# Altium PCB PCB.PcbDoc
Units mm, origin at the board's own origin, x right, y up, seen from the top; angles counter-clockwise.
Board outline 45 x 65 mm, 2 copper layers (Top Layer, Bottom Layer); 56 components, 54 nets, 217 pads, 482 vias.
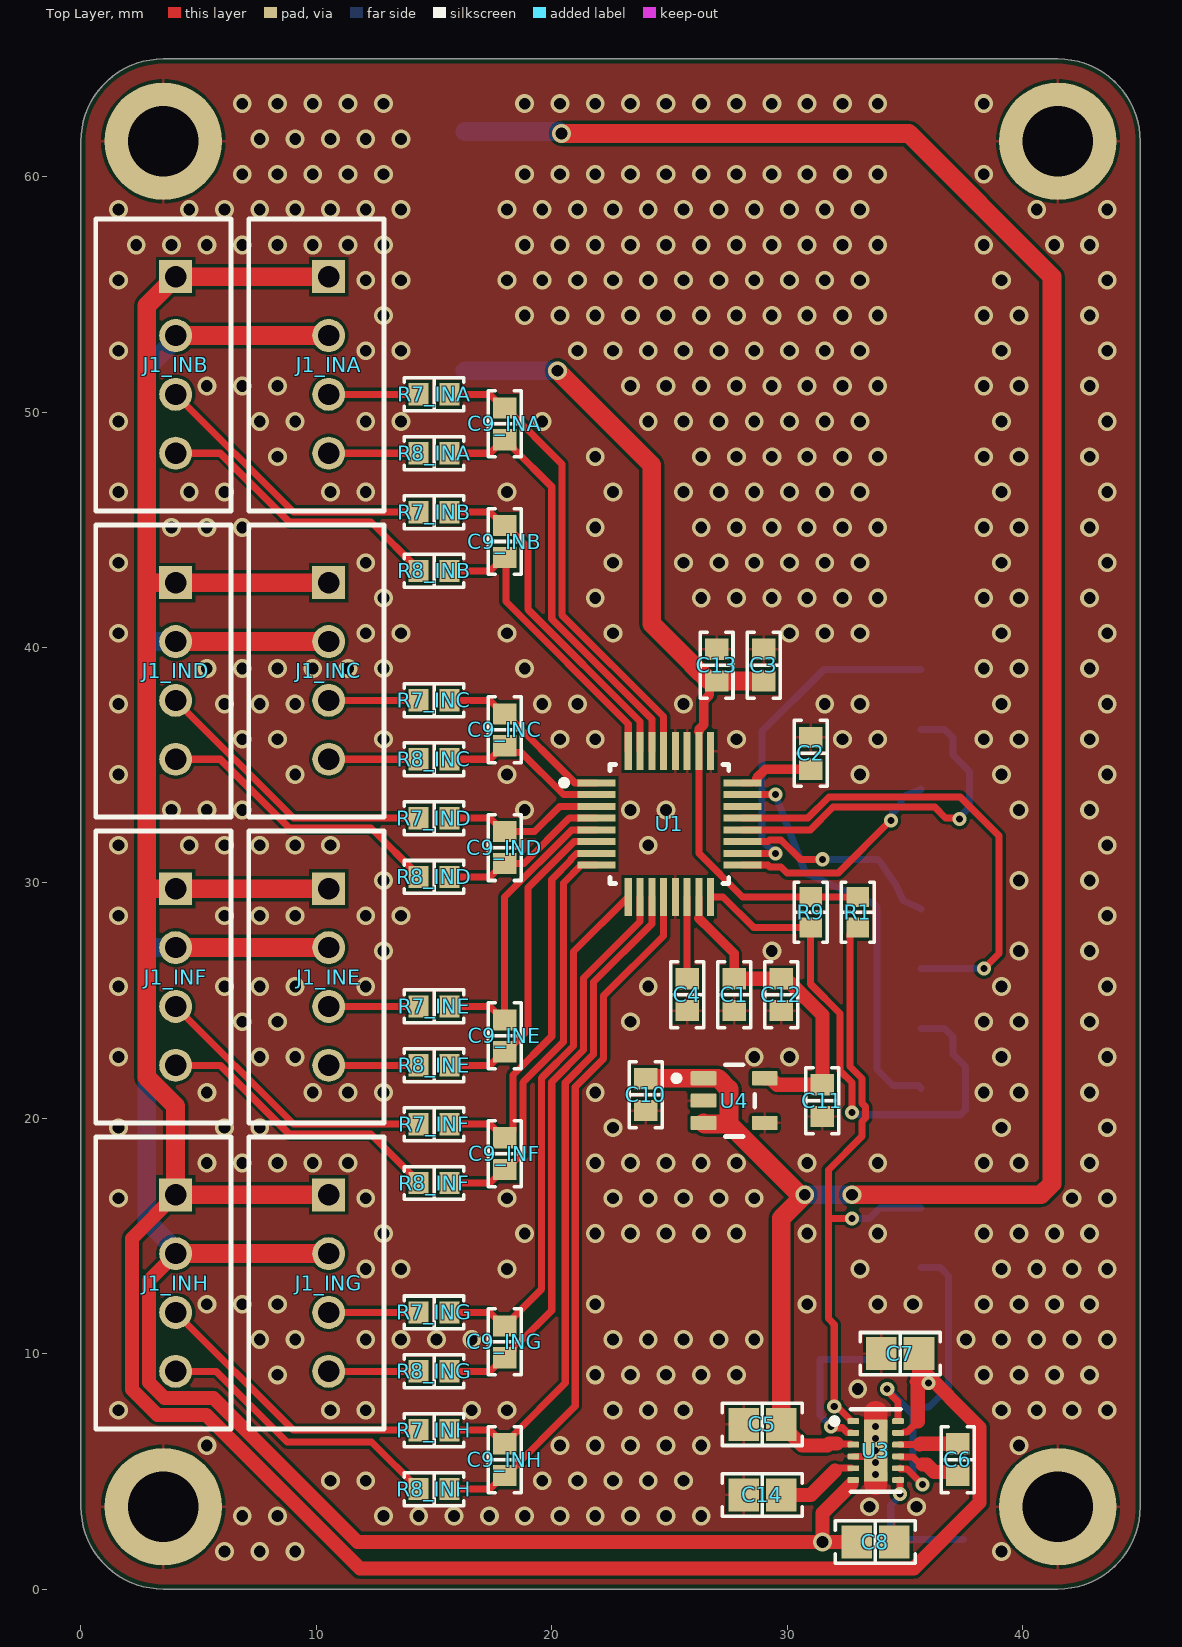
[diagram p0: Top Layer view]
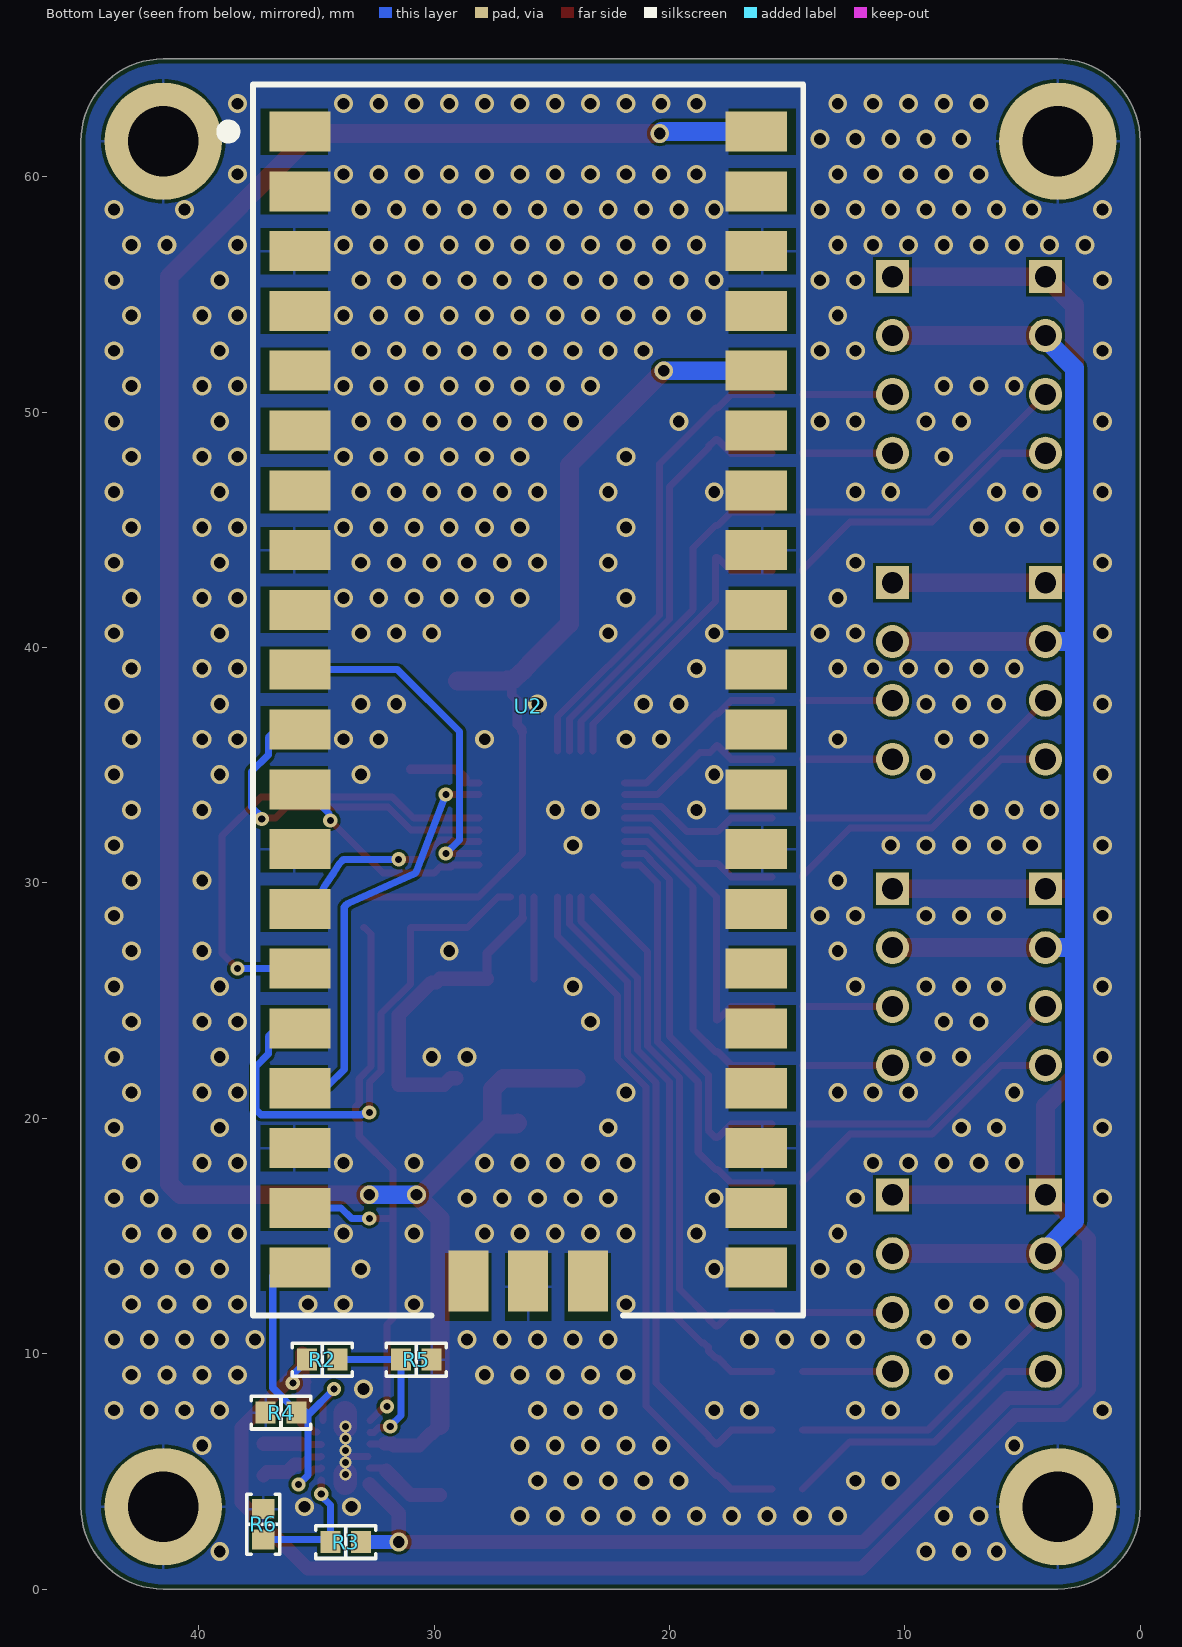
[diagram p1: Bottom Layer view, seen from below]
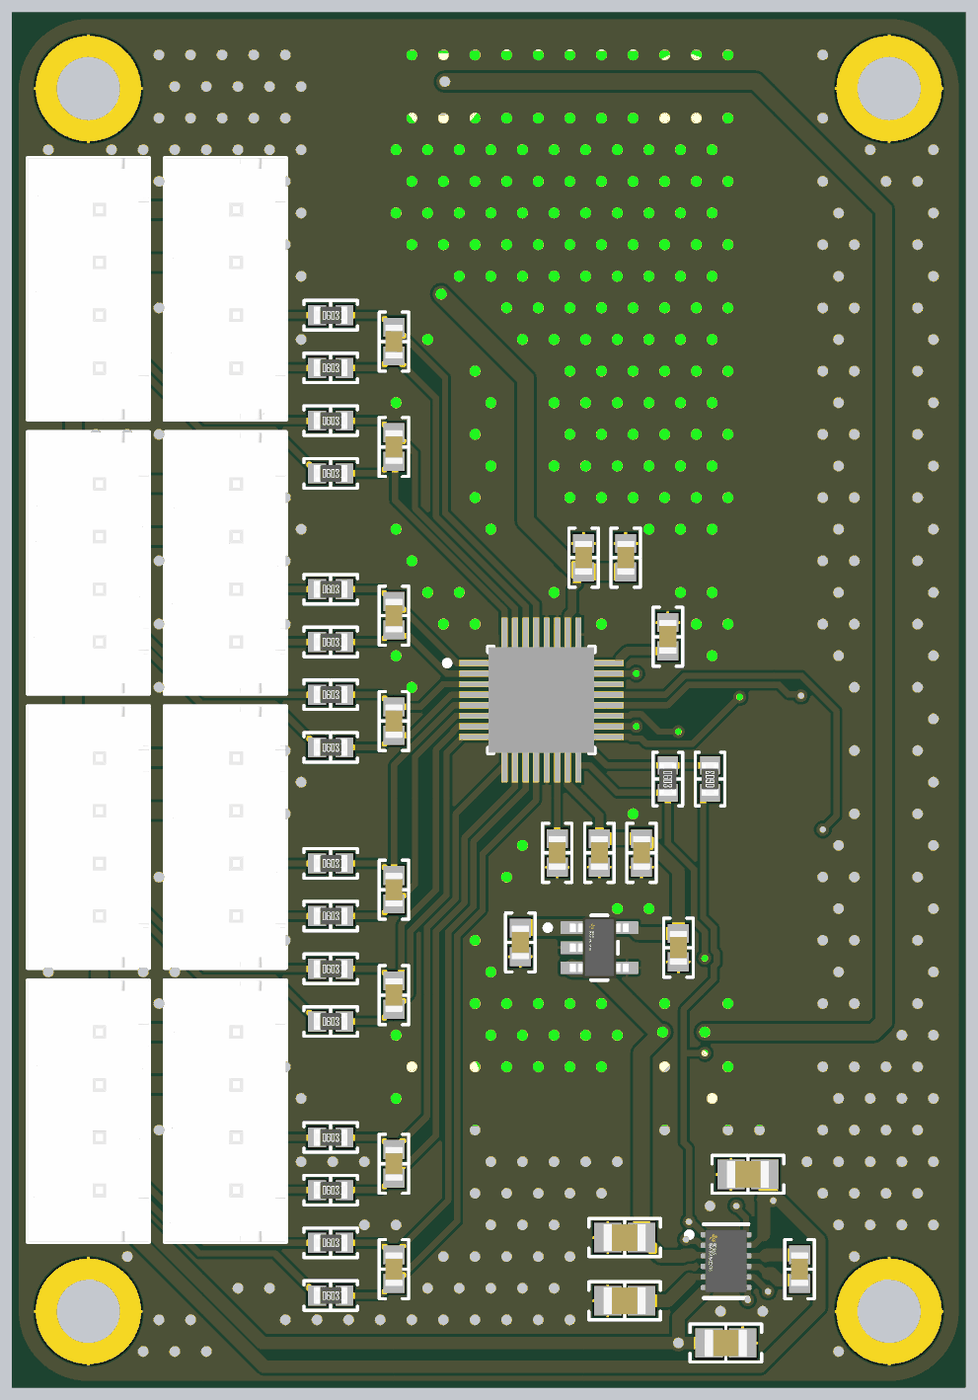
[diagram p2: 3D render of the assembled board from above, using the file's embedded part models]
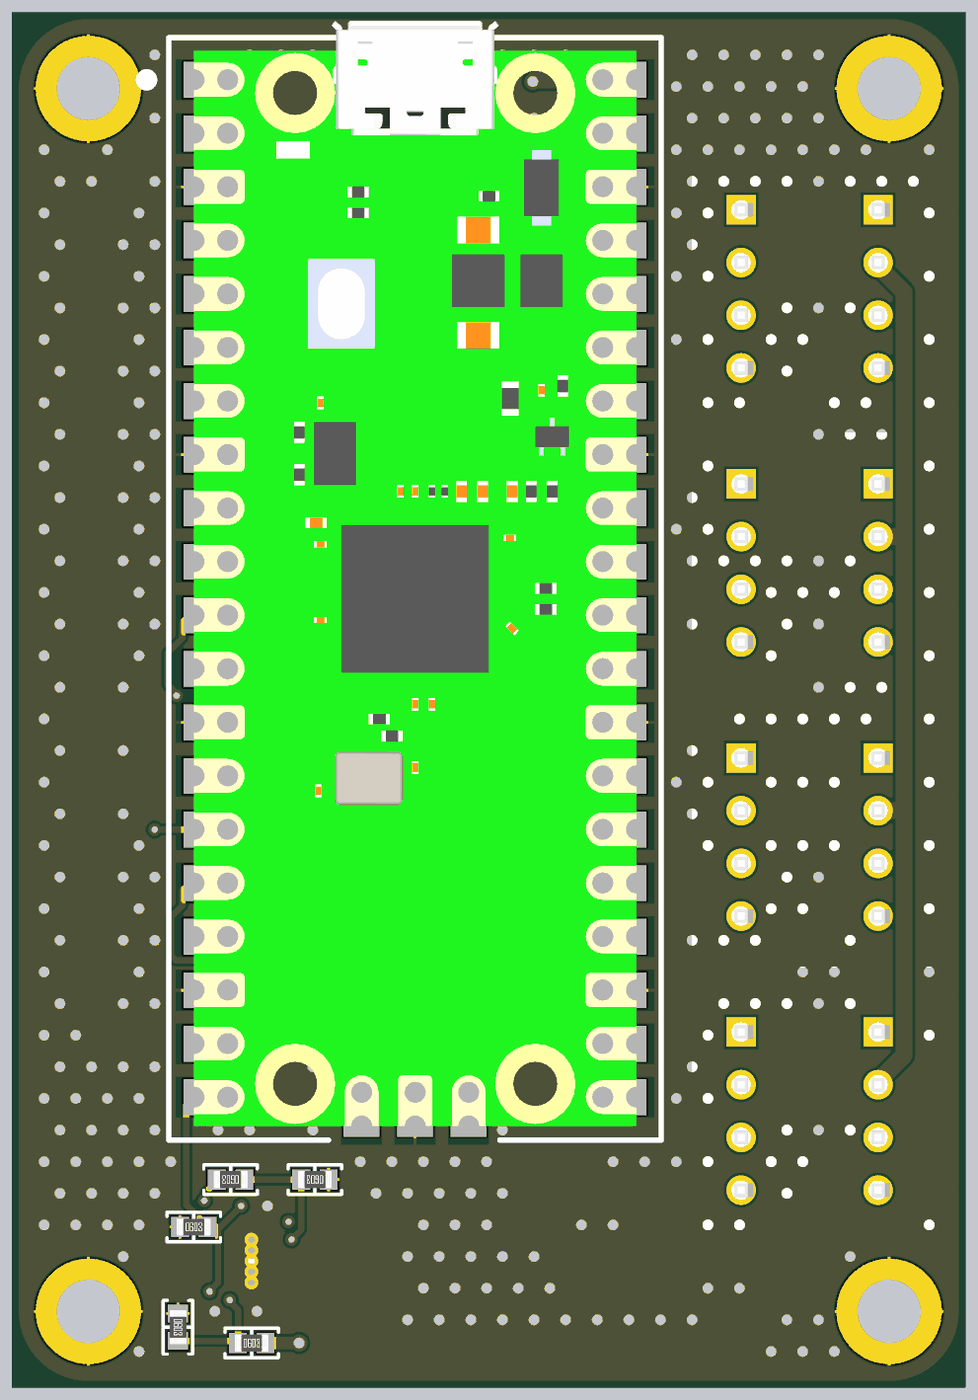
[diagram p3: 3D render of the assembled board from below, using the file's embedded part models]

## Layer stack, top to bottom
Top Solder: solder mask 0.0102, Solder Resist, Dk 3.5
Top Layer: signal copper 0.0356
Dielectric 1: dielectric 0.32, FR-4, Dk 4.8
Bottom Layer: signal copper 0.0356
Bottom Solder: solder mask 0.0102, Solder Resist, Dk 3.5

## Board outline
3.5,0 cw(c3.5,3.5) 0,3.5 0,61.5 cw(c3.5,61.5) 3.5,65 41.5,65 cw(c41.5,61.5) 45,61.5 45,3.5 cw(c41.5,3.5) 41.5,0

## Design rules (kind name [scope] priority, off if disabled: settings)
BoardOutlineClearance [All] p1: gap=0.2 ignorepadtopadclearanceinfootprint=FALSE
Clearance [All] p1: gap=0.127 ignorepadtopadclearanceinfootprint=FALSE except(0.25: Arc-Hole Track-Hole SMDPad-Hole THPad-Hole Via-Hole Fill-Hole Poly-Hole Region-Hole Text-Hole)
ComponentClearance [All] p1: gap=0.127 collisioncheckmode=3 verticalgap=0.127 showdistances=TRUE
DiffPairsRouting [All] p1: maxlimit=0.254 minlimit=0.127 mostfreqgap=0.127 toplayer_minwidth=0.127 toplayer_maxwidth=25.4 toplayer_prefwidth=0.127 bottomlayer_minwidth=0.127 bottomlayer_maxwidth=25.4 bottomlayer_prefwidth=0.127 maxuncoupledlength=12.7
Height [All] p1: minheight=0 maxheight=1816.048 prefheight=12.7
HoleSize [All] p1: absolutevalues=TRUE maxlimit=6.3 minlimit=0.3 maxpercent=80.000 minpercent=20.000
HoleToHoleClearance [All] p1: gap=0.25 allowstackedmicrovias=FALSE
MinimumAnnularRing [All] p1: minimumring=0.076
MinimumSolderMaskSliver [All] p1: minsoldermaskwidth=0
PlaneClearance [All] p1: clearance=0.127
PlaneConnect PlaneConnectPowerPads [InPadClass('PowerPads')] p1: planeconnectstyle=Direct reliefexpansion=0.508 reliefentries=4 reliefconductorwidth=0.254 reliefairgap=0.254
PlaneConnect [All] p2: pad.planeconnectstyle=Relief pad.reliefexpansion=0.3 pad.reliefentries=4 pad.reliefconductorwidth=0.127 pad.reliefairgap=0.127 via.planeconnectstyle=Direct via.reliefexpansion=0.3 via.reliefentries=4 via.reliefconductorwidth=0.127 via.reliefairgap=0.127
PolygonConnect PolygonConnectPowerPads [All vs (InPadClass('PowerPads'))] p1: connectstyle=Direct reliefconductorwidth=0.254 reliefentries=4 polygonreliefangle="90 Angle" airgapwidth=0.254
PolygonConnect [All] p2: thpad.connectstyle=Relief thpad.reliefconductorwidth=0.127 thpad.reliefentries=4 thpad.polygonreliefangle="90 Angle" thpad.airgapwidth=0.127 smdpad.connectstyle=Relief smdpad.reliefconductorwidth=0.127 smdpad.reliefentries=4 smdpad.polygonreliefangle="90 Angle" smdpad.airgapwidth=0.127 via.connectstyle=Direct via.reliefconductorwidth=0.127 via.reliefentries=4 via.polygonreliefangle="90 Angle" via.airgapwidth=0.127
RoutingVias [All] p1: holewidth=0.3 width=0.6 viastyle="Through Hole" minholewidth=0.3 minwidth=0.5 maxholewidth=0.6 maxwidth=6.6
SilkToSilkClearance [All] p1: silktosilkclearance=0
SilkToSolderMaskClearance [IsPad] p1: minsilkscreentomaskgap=0.127 clearancetoexposedcopper=TRUE
SolderMaskExpansion [All] p1: expansion=0.075 istentingtop=FALSE
SupplyNets "Schematic Supply Nets_5" [InNet('GND')] p1: voltage=0.000
SupplyNets "Schematic Supply Nets_4" [InNet('VDDA')] p2: voltage=0.000
SupplyNets "Schematic Supply Nets_3" [InNet('VSYS')] p3: voltage=0.000
SupplyNets "Schematic Supply Nets_2" [InNet('-5')] p4: voltage=0.000
SupplyNets "Schematic Supply Nets_1" [InNet('+5')] p5: voltage=0.000
SupplyNets "Schematic Supply Nets" [InNet('VDDD')] p6: voltage=0.000
Width [All] p1: maxlimit=25.4 minlimit=0.127 preferedwidth=0.3 minimp=50.000000 maximp=50.000000 favimp=50.000000
20 further rules are at their usual default settings.

## Classes and differential pairs
channel class Input: INA INB INC IND INE INF ING INH
component class INA: C9_INA J1_INA R7_INA R8_INA
component class INB: C9_INB J1_INB R7_INB R8_INB
component class INC: C9_INC J1_INC R7_INC R8_INC
component class IND: C9_IND J1_IND R7_IND R8_IND
component class INE: C9_INE J1_INE R7_INE R8_INE
component class INF: C9_INF J1_INF R7_INF R8_INF
component class ING: C9_ING J1_ING R7_ING R8_ING
component class INH: C9_INH J1_INH R7_INH R8_INH
component class AFE: C1 C2 C3 C4 C5 C6 C7 C8 C10 C11 C12 C13 C14 R1 R2 R3 R4 R5 R6 R9 U1 U2 U3 U4

## Components (designator, comment, footprint, x,y, rotation, side; value= is the part's Value field where it differs from the comment)
C1 "1 µF" "CAP 0603_1608" 27.75,25.25 r90 top
C2 "0.22 µF" "CAP 0603_1608" 31,35.5 r270 top
C3 "1 µF" "CAP 0603_1608" 29,39.25 r270 top
C4 "0.1 µF" "CAP 0603_1608" 25.75,25.25 r90 top
C5 "10 µF" "CAP 0805_2012" 28.95,7 r0 top
C6 "1 µF" "CAP 0603_1608" 37.25,5.5 r90 top
C7 "10 µF" "CAP 0805_2012" 34.8,10 r0 top
C8 "10 µF" "CAP 0805_2012" 33.75,2 r180 top
C9_INA "0.1 µF" "CAP 0603_1608" 18,49.5 r90 top locked (schematic designator C9)
C9_INB "0.1 µF" "CAP 0603_1608" 18,44.5 r90 top locked (schematic designator C9)
C9_INC "0.1 µF" "CAP 0603_1608" 18,36.5 r90 top locked (schematic designator C9)
C9_IND "0.1 µF" "CAP 0603_1608" 18,31.5 r90 top locked (schematic designator C9)
C9_INE "0.1 µF" "CAP 0603_1608" 18,23.5 r90 top locked (schematic designator C9)
C9_INF "0.1 µF" "CAP 0603_1608" 18,18.5 r90 top locked (schematic designator C9)
C9_ING "0.1 µF" "CAP 0603_1608" 18,10.5 r90 top locked (schematic designator C9)
C9_INH "0.1 µF" "CAP 0603_1608" 18,5.5 r90 top locked (schematic designator C9)
C10 "1 µF" "CAP 0603_1608" 24,21 r90 top
C11 "1 µF" "CAP 0603_1608" 31.5,20.75 r90 top
C12 "0.1 µF" "CAP 0603_1608" 29.75,25.25 r90 top
C13 "0.1 µF" "CAP 0603_1608" 27,39.25 r270 top
C14 "10 µF" "CAP 0805_2012" 28.95,4 r0 top
J1_INA "B4B-XH-A(LF)(SN)" FP-B4B-XH-A_LF_SN-MFG 10,52 r90 top locked (schematic designator J1)
J1_INB "B4B-XH-A(LF)(SN)" FP-B4B-XH-A_LF_SN-MFG 3.5,52 r90 top locked (schematic designator J1)
J1_INC "B4B-XH-A(LF)(SN)" FP-B4B-XH-A_LF_SN-MFG 10,39 r90 top locked (schematic designator J1)
J1_IND "B4B-XH-A(LF)(SN)" FP-B4B-XH-A_LF_SN-MFG 3.5,39 r90 top locked (schematic designator J1)
J1_INE "B4B-XH-A(LF)(SN)" FP-B4B-XH-A_LF_SN-MFG 10,26 r90 top locked (schematic designator J1)
J1_INF "B4B-XH-A(LF)(SN)" FP-B4B-XH-A_LF_SN-MFG 3.5,26 r90 top locked (schematic designator J1)
J1_ING "B4B-XH-A(LF)(SN)" FP-B4B-XH-A_LF_SN-MFG 10,13 r90 top locked (schematic designator J1)
J1_INH "B4B-XH-A(LF)(SN)" FP-B4B-XH-A_LF_SN-MFG 3.5,13 r90 top locked (schematic designator J1)
R1 "10 kOhms" "RES 0603_1608" 33,28.75 r90 top
R2 "130k" "RES 0603_1608" 34.75,9.75 r0 bottom
R3 "150k" "RES 0603_1608" 33.75,2 r180 bottom
R4 "10 kOhms" "RES 0603_1608" 36.5,7.5 r180 bottom
R5 "47k" "RES 0603_1608" 30.75,9.75 r0 bottom
R6 "56k" "RES 0603_1608" 37.25,2.75 r270 bottom
R7_INA "1 kOhms" "RES 0603_1608" 15,50.75 r0 top locked (schematic designator R7)
R7_INB "1 kOhms" "RES 0603_1608" 15,45.75 r0 top locked (schematic designator R7)
R7_INC "1 kOhms" "RES 0603_1608" 15,37.75 r0 top locked (schematic designator R7)
R7_IND "1 kOhms" "RES 0603_1608" 15,32.75 r0 top locked (schematic designator R7)
R7_INE "1 kOhms" "RES 0603_1608" 15,24.75 r0 top locked (schematic designator R7)
R7_INF "1 kOhms" "RES 0603_1608" 15,19.75 r0 top locked (schematic designator R7)
R7_ING "1 kOhms" "RES 0603_1608" 15,11.75 r0 top locked (schematic designator R7)
R7_INH "1 kOhms" "RES 0603_1608" 15,6.75 r0 top locked (schematic designator R7)
R8_INA "1 kOhms" "RES 0603_1608" 15,48.25 r0 top locked (schematic designator R8)
R8_INB "1 kOhms" "RES 0603_1608" 15,43.25 r0 top locked (schematic designator R8)
R8_INC "1 kOhms" "RES 0603_1608" 15,35.25 r0 top locked (schematic designator R8)
R8_IND "1 kOhms" "RES 0603_1608" 15,30.25 r0 top locked (schematic designator R8)
R8_INE "1 kOhms" "RES 0603_1608" 15,22.25 r0 top locked (schematic designator R8)
R8_INF "1 kOhms" "RES 0603_1608" 15,17.25 r0 top locked (schematic designator R8)
R8_ING "1 kOhms" "RES 0603_1608" 15,9.25 r0 top locked (schematic designator R8)
R8_INH "1 kOhms" "RES 0603_1608" 15,4.25 r0 top locked (schematic designator R8)
R9 "10 kOhms" "RES 0603_1608" 31,28.75 r270 top
U1 "ADS131M08IPBS" FP-PBS0032A-MFG 25,32.5 r0 top locked
U2 "RPI-PICO-MOD" RPI-PICO-MOD 26,37.5 r180 bottom locked
U3 "LM27762DSST" FP-DSS0012B-MFG 33.762,5.885 r0 top
U4 "TPS7A2033PDBVR" FP-DBV0005A-MFG 27.75,20.75 r0 top

## Footprints (in the part's own frame and the unit in brackets; to place one, negate y for a bottom-side part, rotate by r counter-clockwise, add the part's x,y. Pads: shape width x height; smd on the part's side, far side on the other; paste and mask are expansions set on the pad)
"CAP 0603_1608" [mm] "Chip Capacitor, 2-Leads, Body 1.60x0.80mm, IPC Medium Density"
  rect 0.9x1 smd: 1(-0.675,0) 2(0.675,0)
  silkscreen extent -1.4,-0.7 1.4,0.7, body extent -0.8,-0.41 0.8,0.41, height 0.82
"CAP 0805_2012" [mm] "Chip Capacitor, 2-Leads, Body 2.00x1.20mm, IPC Medium Density"
  rect 1.3x1.4 smd: 1(-0.8,0) 2(0.8,0)
  silkscreen extent -1.7,-0.9 1.7,0.9, body extent -1,-0.64 1,0.64, height 1.26
FP-B4B-XH-A_LF_SN-MFG [mm]
  rect 1.4x1.4 hole 0.9 paste-2539.97 mask+0: 1(3.75,-0.525)
  round 1.4 hole 0.9 paste-2539.97 mask+0: 2(1.25,-0.525) 3(-1.25,-0.525) 4(-3.75,-0.525)
  silkscreen extent -6.2,-2.88 6.2,2.88, body extent -6.3,-2.98 6.3,2.98, height 0.25
FP-DBV0005A-MFG [mm]
  rrect17% 1.1x0.6 smd paste+0 mask+0: 1(-1.3,0.95) 2(-1.3,0) 3(-1.3,-0.95) 4(1.3,-0.95) 5(1.3,0.95)
  silkscreen extent -2.57,-1.53 0.87,1.53, body extent -1.95,-1.78 1.95,1.78, height 0.25
FP-DSS0012B-MFG [mm]
  rrect40% 0.5x0.25 smd paste+0 mask+0: 1(-0.95,1.25) 2(-0.95,0.75) 3(-0.95,0.25) 4(-0.95,-0.25) 5(-0.95,-0.75) 6(-0.95,-1.25) 7(0.95,-1.25) 8(0.95,-0.75) 9(0.95,-0.25) 10(0.95,0.25) 11(0.95,0.75) 12(0.95,1.25)
  rrect10% 1x2.65 smd paste-1000 mask+0: 13(0,0)
  silkscreen extent -1.87,-1.75 1.05,1.75, body extent -1.3,-1.65 1.3,1.65, height 0.25
FP-PBS0032A-MFG [mm]
  rect 1.6x0.3 smd paste-1000 mask+0: 1(-3.1,1.75) 2(-3.1,1.25) 3(-3.1,0.75) 4(-3.1,0.25) 5(-3.1,-0.25) 6(-3.1,-0.75) 7(-3.1,-1.25) 8(-3.1,-1.75) 17(3.1,-1.75) 18(3.1,-1.25) 19(3.1,-0.75) 20(3.1,-0.25) 21(3.1,0.25) 22(3.1,0.75) 23(3.1,1.25) 24(3.1,1.75)
  rect 0.3x1.6 smd paste-1000 mask+0: 9(-1.75,-3.1) 10(-1.25,-3.1) 11(-0.75,-3.1) 12(-0.25,-3.1) 13(0.25,-3.1) 14(0.75,-3.1) 15(1.25,-3.1) 16(1.75,-3.1) 25(1.75,3.1) 26(1.25,3.1) 27(0.75,3.1) 28(0.25,3.1) 29(-0.25,3.1) 30(-0.75,3.1) 31(-1.25,3.1) 32(-1.75,3.1)
  silkscreen extent -4.6,-2.52 2.52,2.52, body extent -4,-4 4,4, height 0.25
"RES 0603_1608" [mm] "Chip Resistor, 2-Leads, Body 1.60x0.80mm, IPC Medium Density"
  rect 0.85x0.95 smd: 1(-0.65,0) 2(0.65,0)
  silkscreen extent -1.27,-0.7 1.27,0.7, body extent -0.8,-0.4 0.8,0.4, height 0.45
RPI-PICO-MOD [mm] "RASPBERRY PI PICO RP2040 BOARD"
  rect 2.6x1.7 smd mask+0.102: 1(-9.69,24.415) 2(-9.69,21.875) 3(-9.69,19.335) 4(-9.69,16.795) 5(-9.69,14.255) 6(-9.69,11.715) 7(-9.69,9.175) 8(-9.69,6.635) 9(-9.69,4.095) 10(-9.69,1.555) 11(-9.69,-0.985) 12(-9.69,-3.525) 13(-9.69,-6.065) 14(-9.69,-8.605) 15(-9.69,-11.145) 16(-9.69,-13.685) 17(-9.69,-16.225) 18(-9.69,-18.765) 19(-9.69,-21.305) 20(-9.69,-23.845)
  rect 2.6x1.7 smd: 21(9.69,-23.845) 22(9.69,-21.305) 23(9.69,-18.765) 24(9.69,-16.225) 25(9.69,-13.685) 26(9.69,-11.145) 27(9.69,-8.605) 28(9.69,-6.065) 29(9.69,-3.525) 30(9.69,-0.985) 31(9.69,1.555) 32(9.69,4.095) 33(9.69,6.635) 34(9.69,9.175) 35(9.69,11.715) 36(9.69,14.255) 37(9.69,16.795) 38(9.69,19.335) 39(9.69,21.875) 40(9.69,24.415)
  rect 1.7x2.6 smd: 41(-2.54,-24.415) 42(0,-24.415) 43(2.54,-24.415)
  silkscreen extent -12.99,-25.88 11.68,26.42, body extent -10.49,-25.21 10.51,27.22, height 3.69

## Part data
C1 C3 C10 C11: library part C0603C105K4RACAUTO, "CAP CER 1UF 16V X7R 0603", Device Package="0603 (1608 Metric)", Manufacturer=KEMET, Operating Temperature="-55°C ~ 125°C", Ratings=AEC-Q200, Supplier Part Number 1=399-17704-1-ND, Temperature Coefficient=X7R, Tolerance=±10%, Voltage - Rated=16V, Applications="Automotive, Bypass, Decoupling", Capacitance="1 µF", ComponentLink1Description=Datasheet, ComponentLink1URL=https://api.kemet.com/component-edge/download/datasheet/C0603C105K4RACAUTO.pdf, ComponentLink2Description="DigiKey Link", ComponentLink2URL=https://www.digikey.com/en/products/detail/kemet/C0603C105K4RACAUTO/8635831, lastupdated="2/9/2024 8:10:30 PM", Lifecycle Status=Active, Minimum Order=1, Mounting Type="Surface Mount, MLCC", Package / Case="0603 (1608 Metric)", Packaging=TapeAndReel, Part Number=C0603C105K4RACAUTO, Part Status=Active, partid=2179, price=0.01, series="SMD Auto X7R", Size / Dimension="0.063\" L x 0.031\" W (1.60mm x 0.80mm)", Supplier 1=DigiKey, Thickness (Max)="0.037\" (0.95mm)"
C2: library part 0603BB224K500YT, "CAP CER 0.22UF 50V X7R 0603", Capacitance=220nF, Device Package="0603 (1608 Metric)", Manufacturer="Knowles Novacap", Operating Temperature="-55°C ~ 125°C", Supplier Part Number 1=1763-1192-1-ND, Temperature Coefficient=X7R, Tolerance=±10%, Voltage - Rated=50V, Applications="General Purpose", ComponentLink1Description=Datasheet, ComponentLink1URL=https://www.knowlescapacitors.com/getattachment/6c8d48ef-fc2b-4752-ae2c-ce6c208de0c4/High-Capacitance-Chip.aspx, ComponentLink2Description="DigiKey Link", ComponentLink2URL=https://www.digikey.com/en/products/detail/knowles-novacap/0603BB224K500YT/7304085, lastupdated="2/9/2024 8:10:30 PM", Lifecycle Status=Active, Minimum Order=1, Mounting Type="Surface Mount, MLCC", Package / Case="0603 (1608 Metric)", Packaging=TapeAndReel, Part Number=0603BB224K500YT, Part Status=Active, partid=2162, price=0.49, series=-, Size / Dimension="0.060\" L x 0.030\" W (1.52mm x 0.76mm)", Supplier 1=DigiKey, Thickness (Max)="0.035\" (0.89mm)"
C4 C9_INA C9_INB C9_INC C9_IND C9_INE C9_INF C9_ING C9_INH C12 C13: library part C0603C104K5RAC7411, "CAP CER 0.1UF 50V X7R 0603", Device Package="0603 (1608 Metric)", Manufacturer=KEMET, Operating Temperature="-55°C ~ 125°C", Supplier Part Number 1=399-C0603C104K5RAC7411CT-ND, Temperature Coefficient=X7R, Tolerance=±10%, Voltage - Rated=50V, Applications="Bypass, Decoupling", Capacitance="0.1 µF", ComponentLink1Description=Datasheet, ComponentLink1URL=https://api.kemet.com/component-edge/download/datasheet/C0603C104K5RAC7411.pdf, ComponentLink2Description="DigiKey Link", ComponentLink2URL=https://www.digikey.com/en/products/detail/kemet/C0603C104K5RAC7411/3317013, lastupdated="2/9/2024 8:10:30 PM", Lifecycle Status=Active, Minimum Order=1, Mounting Type="Surface Mount, MLCC", Package / Case="0603 (1608 Metric)", Packaging=TapeAndReel, Part Number=C0603C104K5RAC7411, Part Status=Active, partid=2233, price=0.01, series="SMD Comm X7R", Size / Dimension="0.063\" L x 0.031\" W (1.60mm x 0.80mm)", Supplier 1=DigiKey, Thickness (Max)="0.035\" (0.90mm)"
C5 C7 C8 C14: library part CL21Y106KPQVPNE, "CAP CER 10UF 10V X7S 0805", Device Package="0805 (2012 Metric)", Manufacturer="Samsung Electro-Mechanics", Operating Temperature="-55°C ~ 125°C", Ratings=AEC-Q200, Supplier Part Number 1=1276-6685-1-ND, Temperature Coefficient=X7S, Tolerance=±10%, Voltage - Rated=10V, Applications=Automotive, Capacitance="10 µF", ComponentLink1Description=Datasheet, ComponentLink1URL=http://www.samsungsem.com/kr/support/product-search/mlcc/CL21Y106KPQVPNE.jsp, ComponentLink2Description="DigiKey Link", ComponentLink2URL=https://www.digikey.com/en/products/detail/samsung-electro-mechanics/CL21Y106KPQVPNE/5961169, lastupdated="2/9/2024 8:16:08 PM", Lifecycle Status=Active, Minimum Order=1, Mounting Type="Surface Mount, MLCC", Package / Case="0805 (2012 Metric)", Packaging=TapeAndReel, Part Number=CL21Y106KPQVPNE, Part Status=Active, partid=2979, price=0.06, series=CL, Size / Dimension="0.079\" L x 0.049\" W (2.00mm x 1.25mm)", Supplier 1=DigiKey, Thickness (Max)="0.055\" (1.40mm)"
C6: library part CC0603KRX7R6BB105, "CAP CER 1UF 10V X7R 0603", Device Package="0603 (1608 Metric)", Manufacturer=Yageo, Operating Temperature="-55°C ~ 125°C", Supplier Part Number 1=311-1796-1-ND, Temperature Coefficient=X7R, Tolerance=±10%, Voltage - Rated=10V, Applications="General Purpose", Capacitance="1 µF", ComponentLink1Description=Datasheet, ComponentLink1URL=https://www.yageo.com/upload/media/product/productsearch/datasheet/mlcc/UPY-GPHC_X7R_6.3V-to-50V_18.pdf, ComponentLink2Description="DigiKey Link", ComponentLink2URL=https://www.digikey.com/en/products/detail/yageo/CC0603KRX7R6BB105/5195204, lastupdated="2/9/2024 8:10:30 PM", Lifecycle Status=Active, Minimum Order=1, Mounting Type="Surface Mount, MLCC", Package / Case="0603 (1608 Metric)", Packaging=TapeAndReel, Part Number=CC0603KRX7R6BB105, Part Status=Active, partid=2290, price=0.01, series=CC, Size / Dimension="0.063\" L x 0.031\" W (1.60mm x 0.80mm)", Supplier 1=DigiKey, Thickness (Max)="0.035\" (0.90mm)"
J1_INA J1_INB J1_INC J1_IND J1_INE J1_INF J1_ING J1_INH: library part CMP-002-00071-4, "Header for PCB; pitch 2.50mm; 4-contacts; THT male; top entry; 250V/3A"
R1 R4 R9: library part RNCS0603BKE10K0, "RES 10K OHM 0.1% 1/16W 0603", Device Package="0603 (1608 Metric)", Manufacturer="Stackpole Electronics Inc", Operating Temperature="-55°C ~ 155°C", Power (Watts)="0.063W, 1/16W", Ratings=AEC-Q200, Supplier Device Package=0603, Supplier Part Number 1=RNCS0603BKE10K0CT-ND, Temperature Coefficient=±25ppm/°C, Tolerance=±0.1%, ComponentLink1Description=Datasheet, ComponentLink1URL=https://www.seielect.com/catalog/sei-rncs_rnch.pdf, ComponentLink2Description="DigiKey Link", ComponentLink2URL=https://www.digikey.com/en/products/detail/stackpole-electronics-inc/RNCS0603BKE10K0/1708836, Composition="Thin Film", Features="Anti-Corrosive, Automotive AEC-Q200, Moisture Resistant", Height - Seated (Max)="0.022\" (0.55mm)", lastupdated="2/9/2024 8:43:37 PM", Lifecycle Status=Active, Minimum Order=1, Number of Terminations=2, Package / Case="0603 (1608 Metric)", Packaging=TapeAndReel, Part Number=RNCS0603BKE10K0, Part Status=Active, partid=4838, price=0.06, Resistance="10 kOhms", series=RNCS, Size / Dimension="0.061\" L x 0.031\" W (1.55mm x 0.80mm)", Supplier 1=DigiKey
R2 R3 R5 R6: library part RNCS0603BKE10K0, "RES 10K OHM 0.1% 1/16W 0603", Device Package="0603 (1608 Metric)", Manufacturer="Stackpole Electronics Inc", Operating Temperature="-55°C ~ 155°C", Power (Watts)="0.063W, 1/16W", Ratings=AEC-Q200, Resistance="10 kOhms", Supplier Device Package=0603, Supplier Part Number 1=RNCS0603BKE10K0CT-ND, Temperature Coefficient=±25ppm/°C, Tolerance=±0.1%, ComponentLink1Description=Datasheet, ComponentLink1URL=https://www.seielect.com/catalog/sei-rncs_rnch.pdf, ComponentLink2Description="DigiKey Link", ComponentLink2URL=https://www.digikey.com/en/products/detail/stackpole-electronics-inc/RNCS0603BKE10K0/1708836, Composition="Thin Film", Features="Anti-Corrosive, Automotive AEC-Q200, Moisture Resistant", Height - Seated (Max)="0.022\" (0.55mm)", lastupdated="2/9/2024 8:43:37 PM", Lifecycle Status=Active, Minimum Order=1, Number of Terminations=2, Package / Case="0603 (1608 Metric)", Packaging=TapeAndReel, Part Number=RNCS0603BKE10K0, Part Status=Active, partid=4838, price=0.06, series=RNCS, Size / Dimension="0.061\" L x 0.031\" W (1.55mm x 0.80mm)", Supplier 1=DigiKey
R7_INA R7_INB R7_INC R7_IND R7_INE R7_INF R7_ING R7_INH R8_INA R8_INB R8_INC R8_IND R8_INE R8_INF R8_ING R8_INH: library part CPF0603B1K0E, "RES SMD 1K OHM 0.1% 1/16W 0603", Device Package="0603 (1608 Metric)", Manufacturer="TE Connectivity Passive Product", Operating Temperature="-55°C ~ 155°C", Power (Watts)="0.063W, 1/16W", Supplier Device Package=0603, Supplier Part Number 1=A119887CT-ND, Temperature Coefficient=±25ppm/°C, Tolerance=±0.1%, ComponentLink1Description=Datasheet, ComponentLink1URL=https://www.te.com/commerce/DocumentDelivery/DDEController?Action=srchrtrv&DocNm=1773200&DocType=DS&DocLang=English, ComponentLink2Description="DigiKey Link", ComponentLink2URL=https://www.digikey.com/en/products/detail/te-connectivity-passive-product/CPF0603B1K0E/2390473, Composition="Thin Film", Height - Seated (Max)="0.022\" (0.55mm)", lastupdated="2/9/2024 8:43:37 PM", Lifecycle Status=Active, Minimum Order=1, Number of Terminations=2, Package / Case="0603 (1608 Metric)", Packaging=TapeAndReel, Part Number=CPF0603B1K0E, Part Status=Active, partid=4877, price=0.09, Resistance="1 kOhms", series="CPF, Neohm", Size / Dimension="0.061\" L x 0.031\" W (1.55mm x 0.80mm)", Supplier 1=DigiKey
U1: library part CMP-04860-000022-1, "8 CHANNEL 24 BIT SIMULTANEOUS SA"
U2: library part CMP-007-000000-5, "RASPBERRY PI PICO RP2040 BOARD", Manufacturer="Raspberry Pi Foundation", Manufacturer Part No=SC0915, Supplier Part No=2648-SC0915CT-ND, Design Item ID=RPI-PICO-MOD, Mounting Technology=SMT, Source=RPi_Pico.SchLib, Supplier Link=https://www.digikey.com/en/products/detail/raspberry-pi/SC0915/13684020
U3: library part CMP-019-00052-2, "Switched Capacitor Converter, 0.25A, 2200kHz Switching Freq-Max, PDSO12", Case/Package=HVSON, Frequency=2.3MHz, Max Operating Temperature=85°C, Max Supply Voltage=5.5V, Min Operating Temperature=-40°C, Pins=12, RoHS Compliant=Yes
U4: library part CMP-04917-000300-1, "IC REG LINEAR 3.3V 300MA SOT23-5", RoHS Compliant=Yes

## Free pads (board coordinates)
  round 5 hole 3: 1(3.5,3.5) 1(3.5,61.5) 1(41.5,3.5) 1(41.5,61.5)

## Via types
v1: diameter 0.8, hole 0.5, Top Layer to Bottom Layer, tented both sides, 463 vias
v2: diameter 0.6, hole 0.3, Top Layer to Bottom Layer, tented both sides, 14 vias
v3: diameter 0.5, hole 0.3, Top Layer to Bottom Layer, 5 vias

## Nets (pads, with @x,y where several pads share a name; then routed paths per layer and width w, separated by ;. In a path a pad name is that pad's centre, name@x,y a point inside that pad or via, vN(x,y) a via of type N, cw(c..) or ccw(c..) an arc to the next point about the centre after c; other vN are vias at no path point)
+5: C7.2 J1_INA.1 J1_INB.1 J1_INC.1 J1_IND.1 J1_INE.1 J1_INF.1 J1_ING.1 J1_INH.1 R2.2 U3.11 | length 130
  Top Layer w0.3: 34.968,6.664 35.089,6.664 35.548,7.123 ; 35.356,8.809 35.548,9
  Top Layer w0.6: J1_INH.1 2.171,14.896 2.171,8.482 3.257,7.396 5.326,7.396 11.849,0.873 35.377,0.873 38.177,3.673 38.177,6.871 C7.2@35.6,9.448 ; 35.548,7.123 35.548,8.617 ; C7.2 C7.2@35.6,9.448 ; v2(36,8.75) 35.798,8.75 35.548,9 35.6,9.052 C7.2@35.6,9.448
  Top Layer w0.8: J1_ING.1 J1_INH.1 4.025,20.515 2.798,21.742 2.798,29.75 ; J1_INE.1 J1_INF.1 2.798,29.75 ; J1_INC.1 J1_IND.1 2.798,42.75 ; J1_INA.1 J1_INB.1 2.798,54.523 2.798,42.75 ; 2.798,29.75 2.798,42.75
  Bottom Layer w0.3: R2.2 35.4,9.7 35.943,9.157 35.943,8.807 v2(36,8.75)
-5: C8.2 J1_INA.2 J1_INB.2 J1_INC.2 J1_IND.2 J1_INE.2 J1_INF.2 J1_ING.2 J1_INH.2 R3.2 U3.6 | length 111.8
  Top Layer w0.6: J1_INH.2 4.025,14.241 2.898,13.114 2.898,8.783 3.558,8.123 5.627,8.123 11.75,2 v1(31.5,2) ; 32.734,4.456 31.5,3.222 v1(31.5,2) ; C8.2 v1(31.5,2)
  Top Layer w0.8: J1_INH.2 J1_ING.2 ; J1_INF.2 J1_INE.2 ; J1_IND.2 J1_INC.2 ; J1_INB.2 J1_INA.2
  Bottom Layer w0.6: v1(31.5,2) R3.2
  Bottom Layer w0.8: J1_INH.2 4.025,14.412 2.798,15.639 2.798,27.25 ; J1_INF.2 2.798,27.25 ; J1_IND.2 2.798,40.25 ; J1_INB.2 4.025,53.088 2.798,51.861 2.798,40.25 ; 2.798,27.25 2.798,40.25
ADC_CLK: U1.23 U2.17 | length 17.4
  Top Layer w0.3: U1.23 v2(29.5,33.75)
  Bottom Layer w0.3: v2(29.5,33.75) 30.735,30.523 30.757,30.463 30.842,30.379 33.637,29.13 33.688,29.108 33.727,29.069 33.815,28.981 33.815,22.075 34.501,21.389 35.576,21.389 U2.17
AIN0N: C9_INA.2 R7_INA.2 U1.29 | length 20
  Top Layer w0.3: R7_INA.2 17.375,50.75 17.95,50.175 C9_INA.2 18.05,50.175 20.427,47.798 20.427,41.385 24.75,37.062 U1.29
AIN0P: C9_INA.1 R8_INA.2 U1.30 | length 18.4
  Top Layer w0.3: R8_INA.2 17.375,48.25 17.95,48.825 C9_INA.1 18.05,48.825 18.35,48.525 18.35,48.475 20,46.825 20,41.208 24.25,36.958 U1.30
AIN1N: C9_INB.2 R7_INB.2 U1.31 | length 14.6
  Top Layer w0.3: R7_INB.2 17.375,45.75 17.95,45.175 C9_INB.2 18.05,45.175 19,44.225 19,41.604 23.75,36.854 U1.31
AIN1P: C9_INB.1 R8_INB.2 U1.32 | length 13
  Top Layer w0.3: R8_INB.2 17.375,43.25 17.95,43.825 C9_INB.1 18.05,43.825 18.05,41.95 23.25,36.75 U1.32
AIN2N: C9_INC.2 R7_INC.2 U1.1 | length 7.7
  Top Layer w0.3: R7_INC.2 17.375,37.75 17.95,37.175 C9_INC.2 18.05,37.175 20.975,34.25 U1.1
AIN2P: C9_INC.1 R8_INC.2 U1.2 | length 7.3
  Top Layer w0.3: R8_INC.2 17.375,35.25 17.95,35.825 C9_INC.1 18.281,35.544 18.706,35.544 20.5,33.75 U1.2
AIN3N: C9_IND.2 R7_IND.2 U1.3 | length 6.9
  Top Layer w0.3: R7_IND.2 17.375,32.75 17.95,32.175 C9_IND.2 19.263,32.175 20.338,33.25 U1.3
AIN3P: C9_IND.1 R8_IND.2 U1.4 | length 7.3
  Top Layer w0.3: R8_IND.2 17.375,30.25 17.95,30.825 18.822,30.825 20.747,32.75 U1.4
AIN4N: C9_INE.2 R7_INE.2 U1.5 | length 12.9
  Top Layer w0.3: R7_INE.2 17.375,24.75 17.95,24.175 C9_INE.2 18,29.399 20.851,32.25 U1.5
AIN4P: C9_INE.1 R8_INE.2 U1.6 | length 13.7
  Top Layer w0.3: R8_INE.2 17.375,22.25 17.95,22.825 C9_INE.1 18.05,22.825 19,23.775 19,29.796 20.954,31.75 U1.6
AIN5N: C9_INF.2 R7_INF.2 U1.7 | length 16.8
  Top Layer w0.3: R7_INF.2 17.375,19.75 17.95,19.175 C9_INF.2 18.05,19.175 18.35,19.475 18.35,21.833 20,23.483 20,30.146 20.823,30.969 20.823,31.015 21.058,31.25 U1.7
AIN5P: C9_INF.1 R8_INF.2 U1.8 | length 17.5
  Top Layer w0.3: R8_INF.2 17.375,17.25 17.95,17.825 18.05,17.825 18.777,18.552 18.777,21.527 20.5,23.25 20.5,30 21.25,30.75 U1.8
AIN6N: C9_ING.2 R7_ING.2 U1.9 | length 23
  Top Layer w0.3: R7_ING.2 17.375,11.75 17.95,11.175 C9_ING.2 18.05,11.175 18.35,11.475 18.35,11.525 19.573,12.748 19.573,21.719 20.927,23.073 20.927,27.077 U1.9
AIN6P: C9_ING.1 R8_ING.2 U1.10 | length 24.6
  Top Layer w0.3: R8_ING.2 17.375,9.25 17.95,9.825 C9_ING.1 18.05,9.825 18.35,10.125 18.35,10.272 18.526,10.448 18.615,10.448 20,11.833 20,21.542 21.354,22.896 21.354,25.958 23.75,28.354 U1.10
AIN7N: C9_INH.2 R7_INH.2 U1.11 | length 28.4
  Top Layer w0.3: R7_INH.2 17.375,6.75 17.95,6.175 C9_INH.2 18.05,6.175 18.35,6.475 18.35,6.525 20.573,8.748 20.573,21.511 21.781,22.719 21.781,25.781 24.25,28.25 U1.11
AIN7P: C9_INH.1 R8_INH.2 U1.12 | length 30
  Top Layer w0.3: R8_INH.2 17.375,4.25 17.95,4.825 C9_INH.1 18.05,4.825 21,7.775 21,21.335 22.208,22.543 22.208,25.208 24.75,27.75 U1.12
CH_INA_N: J1_INA.3 R7_INA.1 | length 3.8
  Top Layer w0.3: J1_INA.3 R7_INA.1
CH_INA_P: J1_INA.4 R8_INA.1 | length 3.8
  Top Layer w0.3: J1_INA.4 R8_INA.1
CH_INB_N: J1_INB.3 R7_INB.1 | length 12.4
  Top Layer w0.3: J1_INB.3 9.025,45.75 R7_INB.1
CH_INB_P: J1_INB.4 R8_INB.1 | length 12.4
  Top Layer w0.3: J1_INB.4 5.921,48.25 8.848,45.323 12.327,45.323 14.35,43.3 R8_INB.1
CH_INC_N: J1_INC.3 R7_INC.1 | length 3.8
  Top Layer w0.3: J1_INC.3 R7_INC.1
CH_INC_P: J1_INC.4 R8_INC.1 | length 3.8
  Top Layer w0.3: J1_INC.4 R8_INC.1
CH_IND_N: J1_IND.3 R7_IND.1 | length 12.4
  Top Layer w0.3: J1_IND.3 9.025,32.75 R7_IND.1
CH_IND_P: J1_IND.4 R8_IND.1 | length 12.4
  Top Layer w0.3: J1_IND.4 5.921,35.25 8.848,32.323 12.327,32.323 14.35,30.3 R8_IND.1
CH_INE_N: J1_INE.3 R7_INE.1 | length 3.8
  Top Layer w0.3: J1_INE.3 R7_INE.1
CH_INE_P: J1_INE.4 R8_INE.1 | length 3.8
  Top Layer w0.3: J1_INE.4 R8_INE.1
CH_INF_N: J1_INF.3 R7_INF.1 | length 12.4
  Top Layer w0.3: J1_INF.3 9.025,19.75 R7_INF.1
CH_INF_P: J1_INF.4 R8_INF.1 | length 12.4
  Top Layer w0.3: J1_INF.4 5.921,22.25 8.848,19.323 12.327,19.323 14.35,17.3 R8_INF.1
CH_ING_N: J1_ING.3 R7_ING.1 | length 3.8
  Top Layer w0.3: J1_ING.3 R7_ING.1
CH_ING_P: J1_ING.4 R8_ING.1 | length 3.8
  Top Layer w0.3: J1_ING.4 R8_ING.1
CH_INH_N: J1_INH.3 R7_INH.1 | length 12.4
  Top Layer w0.3: J1_INH.3 9.025,6.75 R7_INH.1
CH_INH_P: J1_INH.4 R8_INH.1 | length 12.4
  Top Layer w0.3: J1_INH.4 5.75,9.25 8.75,6.25 12.35,6.25 R8_INH.1
DRDY: U1.18 U2.10 | length 14.7
  Top Layer w0.3: U1.18 v2(29.5,31.25)
  Bottom Layer w0.3: v2(29.5,31.25) 28.923,31.827 28.923,36.423 31.555,39.055 U2.10
EX_EN: R4.2 U2.20 U3.8 U3.12 | length 15.5
  Top Layer w0.3: v2(34.25,8.5) 34.25,8.419 34.712,7.957 U3.12@34.712,7.16 ; U3.8@34.79,5.135 34.819,5.106 35.089,5.106 v2(35.75,4.445)
  Bottom Layer w0.3: v2(34.25,8.5) 35.345,7.405 ; U2.20 36.502,13.655 36.852,13.305 36.852,8.552 36.03,7.73 35.67,7.73 35.345,7.405 ; v2(35.75,4.445) 35.345,4.85 35.345,7.405
FB+: R2.1 R5.2 U3.2 | length 6.7
  Top Layer w0.3: v2(31.859,6.91) 31.917,6.852 32.357,6.852 32.55,6.66 U3.2@32.712,6.66
  Bottom Layer w0.3: v2(31.859,6.91) 31.859,6.92 31.4,7.379 R5.2 R2.1
FB-: R3.1 R6.2 U3.7 | length 5.9
  Top Layer w0.3: v2(34.79,4.04) U3.7@34.79,4.635
  Bottom Layer w0.3: v2(34.79,4.04) 34.79,3.959 34.4,3.569 R3.1 34.5,2.1 R6.2@37.5,2.1
GND: C1.1 C2.1 C3.1 C4.1 C5.1 C7.1 C8.1 C10.1 C11.1 C12.1 C13.1 C14.1 pad.1 R4.1 R5.1 R6.1 U1.13 U1.25 U1.27 U1.28 U2.3 U2.8 U2.13 U2.18 U2.23 U2.28 U2.33 U2.38 U2.42 U3.4 U3.13 U4.2 U4.4 | length 1.8
  Top Layer w0.3: U3.4 U3.13@33.615,5.635
  Top Layer w1: 33.762,4.493 v3(33.762,4.869) ; v3(33.762,6.901) 33.762,7.488
  other v1: 6.1,1.6 7.6,1.6 9.1,1.6 39.1,1.6 6.85,3.1 8.35,3.1 12.85,3.1 14.35,3.1 15.85,3.1 17.35,3.1 18.85,3.1 20.35,3.1 21.85,3.1 23.35,3.1 24.85,3.1 26.35,3.1 33.5,3.5 35.5,3.5 10.6,4.6 12.1,4.6 19.6,4.6 21.1,4.6 22.6,4.6 24.1,4.6 25.6,4.6 5.35,6.1 20.35,6.1 21.85,6.1 23.35,6.1 24.85,6.1 26.35,6.1 39.85,6.1 1.6,7.6 10.6,7.6 12.1,7.6 16.6,7.6 18.1,7.6 22.6,7.6 24.1,7.6 25.6,7.6 39.1,7.6 40.6,7.6 42.1,7.6 43.6,7.6 33,8.5 8.35,9.1 21.85,9.1 23.35,9.1 24.85,9.1 26.35,9.1 27.85,9.1 38.35,9.1 39.85,9.1 41.35,9.1 42.85,9.1 7.6,10.6 9.1,10.6 12.1,10.6 13.6,10.6 15.1,10.6 16.6,10.6 22.6,10.6 24.1,10.6 25.6,10.6 27.1,10.6 28.6,10.6 37.6,10.6 39.1,10.6 40.6,10.6 42.1,10.6 43.6,10.6 5.35,12.1 6.85,12.1 8.35,12.1 21.85,12.1 30.85,12.1 33.85,12.1 35.35,12.1 38.35,12.1 39.85,12.1 41.35,12.1 42.85,12.1 12.1,13.6 13.6,13.6 18.1,13.6 33.1,13.6 39.1,13.6 40.6,13.6 42.1,13.6 43.6,13.6 12.85,15.1 18.85,15.1 21.85,15.1 23.35,15.1 24.85,15.1 26.35,15.1 27.85,15.1 30.85,15.1 33.85,15.1 38.35,15.1 39.85,15.1 41.35,15.1 42.85,15.1 1.6,16.6 12.1,16.6 18.1,16.6 22.6,16.6 24.1,16.6 25.6,16.6 27.1,16.6 28.6,16.6 42.1,16.6 43.6,16.6 5.35,18.1 6.85,18.1 8.35,18.1 9.85,18.1 11.35,18.1 21.85,18.1 23.35,18.1 24.85,18.1 26.35,18.1 27.85,18.1 30.85,18.1 33.85,18.1 38.35,18.1 39.85,18.1 42.85,18.1 1.6,19.6 6.1,19.6 7.6,19.6 22.6,19.6 39.1,19.6 43.6,19.6 5.35,21.1 9.85,21.1 11.35,21.1 12.85,21.1 21.85,21.1 38.35,21.1 39.85,21.1 42.85,21.1 1.6,22.6 7.6,22.6 9.1,22.6 28.6,22.6 30.1,22.6 39.1,22.6 43.6,22.6 6.85,24.1 8.35,24.1 23.35,24.1 38.35,24.1 39.85,24.1 42.85,24.1 1.6,25.6 6.1,25.6 7.6,25.6 9.1,25.6 12.1,25.6 24.1,25.6 39.1,25.6 43.6,25.6 12.85,27.1 29.35,27.1 39.85,27.1 42.85,27.1 1.6,28.6 6.1,28.6 7.6,28.6 9.1,28.6 12.1,28.6 13.6,28.6 43.6,28.6 12.85,30.1 39.85,30.1 42.85,30.1 1.6,31.6 4.6,31.6 6.1,31.6 7.6,31.6 9.1,31.6 10.6,31.6 24.1,31.6 43.6,31.6 3.85,33.1 5.35,33.1 6.85,33.1 18.85,33.1 23.35,33.1 24.85,33.1 39.85,33.1 42.85,33.1 1.6,34.6 9.1,34.6 18.1,34.6 33.1,34.6 39.1,34.6 43.6,34.6 6.85,36.1 8.35,36.1 12.85,36.1 20.35,36.1 21.85,36.1 27.85,36.1 32.35,36.1 33.85,36.1 38.35,36.1 39.85,36.1 42.85,36.1 1.6,37.6 6.1,37.6 7.6,37.6 9.1,37.6 19.6,37.6 21.1,37.6 25.6,37.6 31.6,37.6 33.1,37.6 39.1,37.6 43.6,37.6 5.35,39.1 6.85,39.1 8.35,39.1 9.85,39.1 11.35,39.1 12.85,39.1 18.85,39.1 38.35,39.1 39.85,39.1 42.85,39.1 1.6,40.6 12.1,40.6 13.6,40.6 18.1,40.6 22.6,40.6 30.1,40.6 31.6,40.6 33.1,40.6 39.1,40.6 43.6,40.6 12.85,42.1 21.85,42.1 26.35,42.1 27.85,42.1 29.35,42.1 30.85,42.1 32.35,42.1 33.85,42.1 38.35,42.1 39.85,42.1 42.85,42.1 1.6,43.6 12.1,43.6 22.6,43.6 25.6,43.6 27.1,43.6 28.6,43.6 30.1,43.6 31.6,43.6 33.1,43.6 39.1,43.6 43.6,43.6 3.85,45.1 5.35,45.1 6.85,45.1 21.85,45.1 26.35,45.1 27.85,45.1 29.35,45.1 30.85,45.1 32.35,45.1 33.85,45.1 38.35,45.1 39.85,45.1 42.85,45.1 1.6,46.6 4.6,46.6 6.1,46.6 10.6,46.6 12.1,46.6 18.1,46.6 22.6,46.6 25.6,46.6 27.1,46.6 28.6,46.6 30.1,46.6 31.6,46.6 33.1,46.6 39.1,46.6 43.6,46.6 8.35,48.1 21.85,48.1 26.35,48.1 27.85,48.1 29.35,48.1 30.85,48.1 32.35,48.1 33.85,48.1 38.35,48.1 39.85,48.1 42.85,48.1 1.6,49.6 7.6,49.6 9.1,49.6 12.1,49.6 13.6,49.6 19.6,49.6 24.1,49.6 25.6,49.6 27.1,49.6 28.6,49.6 30.1,49.6 31.6,49.6 33.1,49.6 39.1,49.6 43.6,49.6 5.35,51.1 6.85,51.1 8.35,51.1 23.35,51.1 24.85,51.1 26.35,51.1 27.85,51.1 29.35,51.1 30.85,51.1 32.35,51.1 33.85,51.1 38.35,51.1 39.85,51.1 42.85,51.1 1.6,52.6 12.1,52.6 13.6,52.6 21.1,52.6 22.6,52.6 24.1,52.6 25.6,52.6 27.1,52.6 28.6,52.6 30.1,52.6 31.6,52.6 33.1,52.6 39.1,52.6 43.6,52.6 12.85,54.1 18.85,54.1 20.35,54.1 21.85,54.1 23.35,54.1 24.85,54.1 26.35,54.1 27.85,54.1 29.35,54.1 30.85,54.1 32.35,54.1 33.85,54.1 38.35,54.1 39.85,54.1 42.85,54.1 1.6,55.6 12.1,55.6 13.6,55.6 18.1,55.6 19.6,55.6 21.1,55.6 22.6,55.6 24.1,55.6 25.6,55.6 27.1,55.6 28.6,55.6 30.1,55.6 31.6,55.6 33.1,55.6 39.1,55.6 43.6,55.6 2.35,57.1 3.85,57.1 5.35,57.1 6.85,57.1 8.35,57.1 9.85,57.1 11.35,57.1 12.85,57.1 18.85,57.1 20.35,57.1 21.85,57.1 23.35,57.1 24.85,57.1 26.35,57.1 27.85,57.1 29.35,57.1 30.85,57.1 32.35,57.1 33.85,57.1 38.35,57.1 41.35,57.1 42.85,57.1 1.6,58.6 4.6,58.6 6.1,58.6 7.6,58.6 9.1,58.6 10.6,58.6 12.1,58.6 13.6,58.6 18.1,58.6 19.6,58.6 21.1,58.6 22.6,58.6 24.1,58.6 25.6,58.6 27.1,58.6 28.6,58.6 30.1,58.6 31.6,58.6 33.1,58.6 40.6,58.6 43.6,58.6 6.85,60.1 8.35,60.1 9.85,60.1 11.35,60.1 12.85,60.1 18.85,60.1 20.35,60.1 21.85,60.1 23.35,60.1 24.85,60.1 26.35,60.1 27.85,60.1 29.35,60.1 30.85,60.1 32.35,60.1 33.85,60.1 38.35,60.1 7.6,61.6 9.1,61.6 10.6,61.6 12.1,61.6 13.6,61.6 6.85,63.1 8.35,63.1 9.85,63.1 11.35,63.1 12.85,63.1 18.85,63.1 20.35,63.1 21.85,63.1 23.35,63.1 24.85,63.1 26.35,63.1 27.85,63.1 29.35,63.1 30.85,63.1 32.35,63.1 33.85,63.1 38.35,63.1
  other v3: 33.762,5.377 33.762,5.885 33.762,6.393
MISO: U1.20 U2.11 | length 15.3
  Top Layer w0.3: U1.20 29.08,32.25 29.084,32.254 29.916,32.254 29.92,32.25 30.98,32.25 31.95,33.22 36.27,33.22 36.728,32.762 37.26,32.762 v2(37.317,32.705)
  Bottom Layer w0.3: U2.11 36.69,36.515 37.04,36.165 37.04,35.435 37.75,34.725 37.75,33.219 37.317,32.786 v2(37.317,32.705)
MOSI: U1.21 U2.15 | length 20.5
  Top Layer w0.3: U1.21 30.877,32.75 31.773,33.647 37.353,33.647 39,32 39,27 v2(38.355,26.355)
  Bottom Layer w0.3: U2.15 v2(38.355,26.355)
NetC2_2: C2.2 U1.24 | length 3.1
  Top Layer w0.3: U1.24 U1.24@28.5,34.25 ; C2.2@30.95,34.825 C2.2
  Top Layer w0.4: U1.24@28.7,34.3 28.7,34.45 29.075,34.825 C2.2
NetC4_2: C4.2 U1.14 | length 3.5
  Top Layer w0.3: C4.2 U1.14
NetC6_1: C6.1 U3.9 | length 2.8
  Top Layer w0.3: U3.9@34.79,5.635 34.819,5.606 35.348,5.606 35.66,5.294 35.75,5.294
  Top Layer w0.6: 35.75,5.294 35.929,5.294 36.248,4.975 37.1,4.975 C6.1
NetC6_2: C6.2 U3.10 | length 2.5
  Top Layer w0.3: U3.10@34.79,6.135 35.635,6.135
  Top Layer w0.6: 35.635,6.135 35.675,6.175 C6.2
NetC14_2: C14.2 U3.5 | length 3.5
  Top Layer w0.3: 32.029,5.029 32.135,5.135 U3.5@32.734,5.135
  Top Layer w0.6: C14.2 31,4 32.029,5.029
PGOOD: R1.1 U2.19 U3.1 | length 26.6
  Top Layer w0.3: U3.1@32.712,7.16 32.179,7.693 32.057,7.693 v2(32,7.75) 32,11.243 31.75,11.493 31.75,15.75 ; v2(32.75,15.75) 31.75,15.75 ; R1.1 32.95,28.1 32.675,27.825 32.675,22.196 33.177,21.694 33.177,20.639 33.327,20.489 33.327,20.011 33.177,19.861 33.177,19.236 31.75,17.809 31.75,15.75
  Bottom Layer w0.3: v2(32.75,15.75) 33.5,15.75 33.945,16.195 U2.19
RESET: R9.2 U1.16 U2.16 | length 23.1
  Top Layer w0.3: U1.16 27.282,29.4 28.582,28.1 R9.2 31,25.695 32.248,24.447 32.248,22.019 32.75,21.517 v2(32.75,20.25)
  Bottom Layer w0.3: v2(32.75,20.25) 32.807,20.193 33.02,20.193 33.064,20.148 37.355,20.148 37.569,20.362 37.569,22.206 37.04,22.735 37.04,23.465 36.69,23.815 U2.16
SPI_CS: U1.17 U2.12 | length 9.4
  Top Layer w0.3: U1.17 29.184,30.75 29.261,30.673 29.739,30.673 29.989,30.423 32.173,30.423 34.393,32.643 v2(34.407,32.643)
  Bottom Layer w0.3: v2(34.407,32.643) 34.464,32.7 34.464,32.949 34.84,33.325 34.84,33.625 U2.12
SPI_SCLK: U1.19 U2.14 | length 9
  Top Layer w0.3: U1.19 29.184,31.75 29.261,31.827 29.739,31.827 30.566,31 v2(31.5,31)
  Bottom Layer w0.3: v2(31.5,31) 33.835,31 34.01,30.824 34.247,30.453 34.638,29.888 34.94,29.245 U2.14
VDDA: C1.2 C11.2 C12.2 U1.15 U4.5 | length 14.1
  Top Layer w0.3: 26.25,28.5 U1.15 ; C1.2@27.7,25.925 C1.2
  Top Layer w0.4: 26.25,28.5 26.273,28.477 26.273,28.465 26.465,28.273 26.477,28.273 27.75,27 C1.2
  Top Layer w0.6: C1.2 C12.2 29.9,25.775 30.104,25.775 31.5,24.379 C11.2 29.575,21.425 29.3,21.7 U4.5
VDDD: C3.2 C13.2 R1.2 R9.1 U1.26 U2.36 | length 37.2
  Top Layer w0.3: 26.25,36.425 26.25,31.258 28.108,29.4 R9.1 R1.2
  Top Layer w0.4: 26.25,36.425 26.273,36.448 26.273,36.535 26.465,36.727 26.465,37.75 26.7,37.985 26.7,38.325 26.95,38.575 C13.2
  Top Layer w0.8: v1(20.245,51.755) 24.25,47.75 24.25,41 25.973,39.277 25.973,39.257 26.282,38.948 26.302,38.948 26.625,38.625 26.9,38.625 C13.2@26.95,38.575 ; C13.2 C3.2
  Bottom Layer w0.8: U2.36 v1(20.245,51.755)
VSYS: C5.2 C10.2 U2.40 U3.3 U4.1 U4.3 | length 101.1
  Top Layer w0.3: 32.106,6.183 32.129,6.16 U3.3@32.712,6.16
  Top Layer w0.6: C5.2@29.75,6.95 30.1,6.6 30.15,6.6 30.644,6.106 31.713,6.106 31.79,6.183 32.106,6.183
  Top Layer w0.8: v1(20.415,61.835) 35.165,61.835 41.25,55.75 41.25,17.219 40.781,16.75 v1(32.75,16.75) ; C10.2@23.975,21.7 27.065,21.7 27.527,21.238 27.527,19.758 ; U4.3 26.492,19.758 27.527,19.758 ; C5.2@29.75,6.95 C5.2 29.75,15.75 v1(30.75,16.75) 30.535,16.75 27.527,19.758
  Bottom Layer w0.8: U2.40 20.335,61.915 v1(20.415,61.835) ; v1(30.75,16.75) v1(32.75,16.75)
pads on no net: U1.22 U2.1 U2.2 U2.4 U2.5 U2.6 U2.7 U2.9 U2.21 U2.22 U2.24 U2.25 U2.26 U2.27 U2.29 U2.30 U2.31 U2.32 U2.34 U2.35 U2.37 U2.39 U2.41 U2.43

## Polygon pours and split planes (outlines as drawn)
GND on Top Layer "GND_L01_P000" (solid, remove dead copper, pour order 0): 0,0 45,0 45,65 0,65
GND on Bottom Layer "GND_L02_P001" (solid, remove dead copper, pour order 1): 0,65 0,0 45,0 45,65

## Silkscreen, mask and mechanical layers (free items; w line width, h text height)
Mechanical 3:
  the board outline again, w0.254